# Altium PCB IMU_Pcb.PcbDoc
Units mil, origin at the board's own origin, x right, y up, seen from the top; angles counter-clockwise.
Board outline 550 x 500 mil, 2 copper layers (Top Layer, Bottom Layer); 20 components, 10 nets, 59 pads, 10 vias.
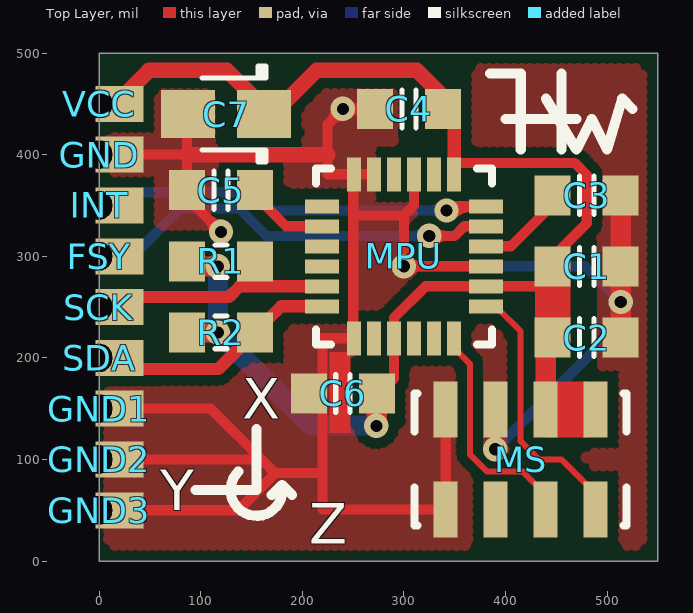
[diagram p0: Top Layer view]
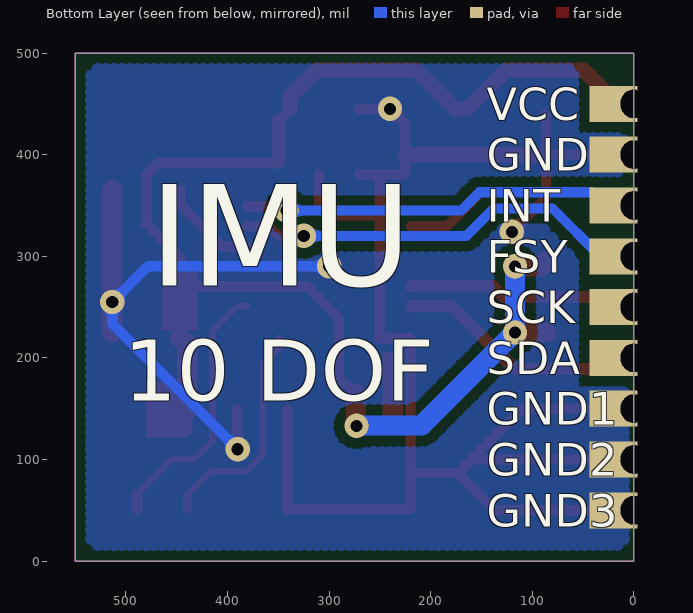
[diagram p1: Bottom Layer view, seen from below]
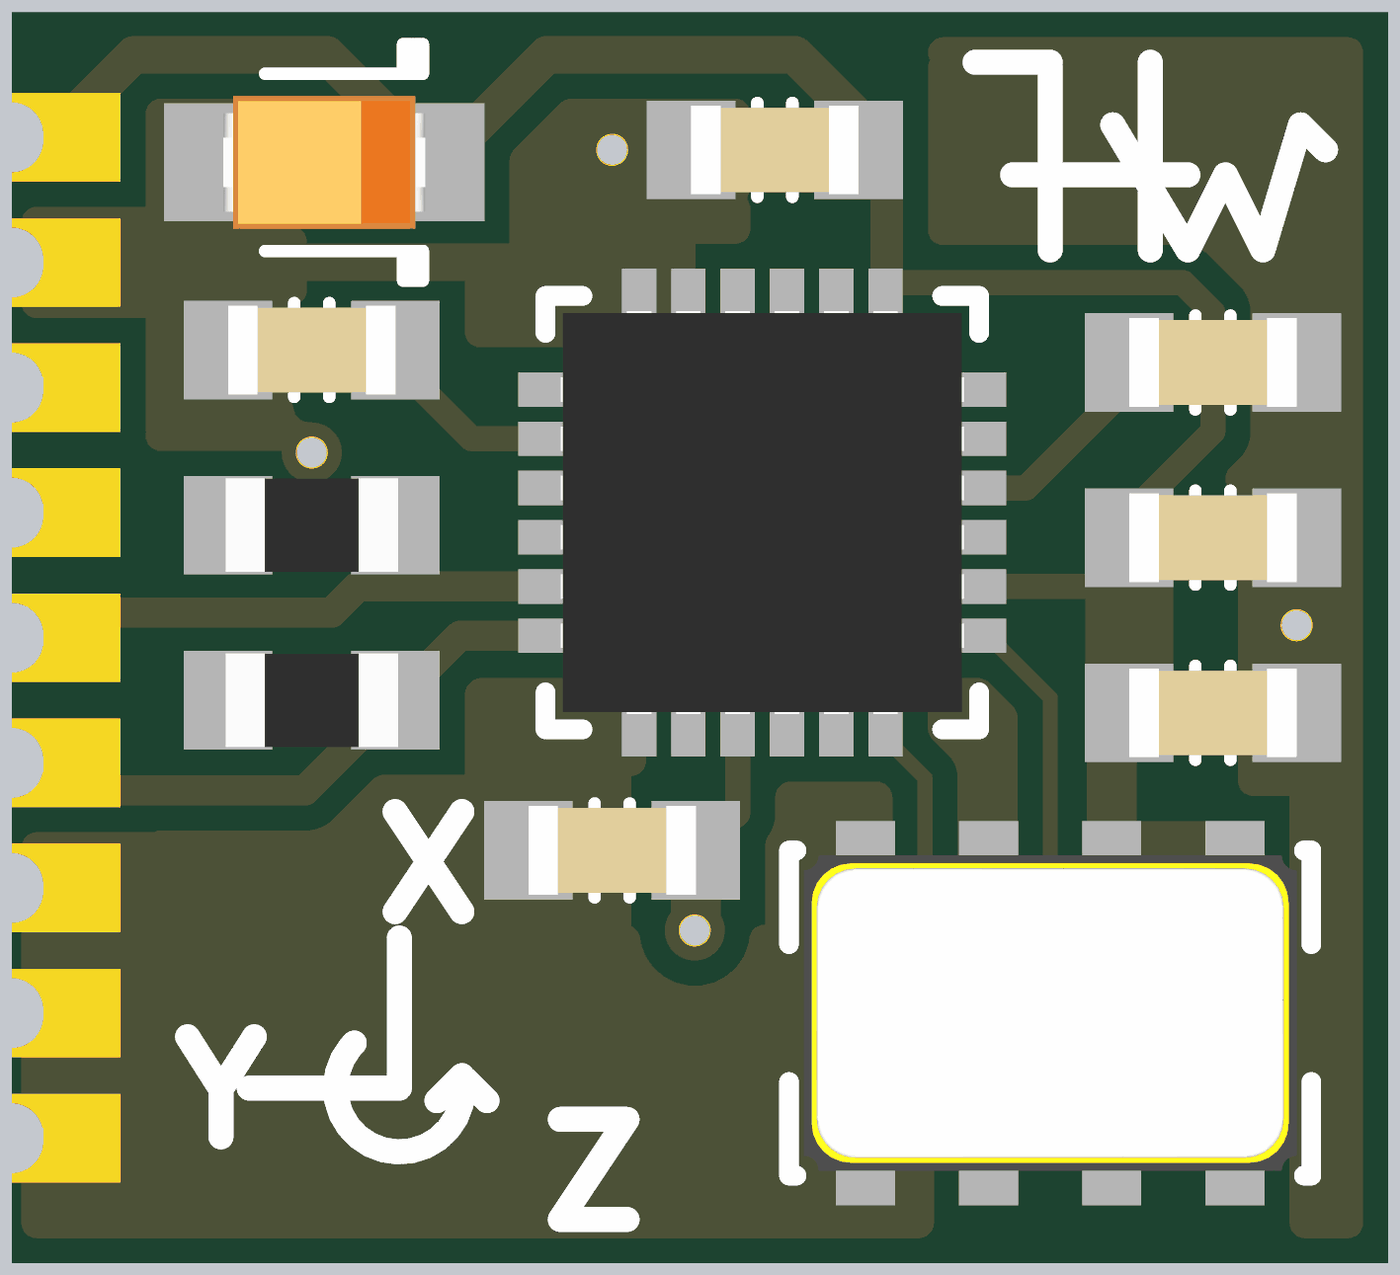
[diagram p2: 3D render of the assembled board from above, using the file's embedded part models]

## Layer stack, top to bottom
Top Layer: signal copper 1.4
Dielectric: dielectric 12.6, FR-4, Dk 4.8
Bottom Layer: signal copper 1.4

## Board outline
0,500 550,500 550,0 0,0

## Design rules (kind name [scope] priority, off if disabled: settings)
Clearance ClearancePolygon [InPolygon] p1: gap=10
Clearance [All] p2: gap=5
ComponentClearance [All] p1: gap=0 collisioncheckmode=3 verticalgap=0 showdistances=FALSE
HoleToHoleClearance [All] p1: gap=6 allowstackedmicrovias=TRUE
MinimumSolderMaskSliver [All] p1: minsoldermaskwidth=5
PlaneConnect [All] p1: planeconnectstyle=Direct reliefexpansion=20 reliefentries=4 reliefconductorwidth=10 reliefairgap=10
PolygonConnect [All] p1: connectstyle=Direct reliefconductorwidth=10 reliefentries=4 polygonreliefangle="90 Angle" airgapwidth=10
RoutingVias [All] p1: holewidth=12 width=20 viastyle="Through Hole" minholewidth=12 minwidth=20 maxholewidth=28 maxwidth=50
SilkToSilkClearance [All] p1: silktosilkclearance=0
SilkToSolderMaskClearance [IsPad] p1: minsilkscreentomaskgap=2 clearancetoexposedcopper=TRUE
SolderMaskExpansion [All] p1: expansion=0
Width [All] p1: maxlimit=20 minlimit=6 preferedwidth=10
22 further rules are at their usual default settings.

## Components (designator, comment, footprint, x,y, rotation, side; value= is the part's Value field where it differs from the comment)
C1 "Cap_0603" CAP_0603 480,290 r180 top
C2 "Cap_0603" CAP_0603 480,220 r180 top
C3 "Cap_0603" CAP_0603 480,360 r180 top
C4 "Cap_0603" CAP_0603 305,445 r0 top
C5 "Cap_0603" CAP_0603 120,365 r180 top
C6 "Cap_0603" CAP_0603 240,165 r180 top
C7 "Cap_Tan_0805" CAP_TAN_P0805 125,440 r180 top
FSY "Pad1X1_1.27" Pad1X1_1.27 0,300 r0 top
GND "Pad1X1_1.27" Pad1X1_1.27 0,400 r0 top
GND1 "Pad1X1_1.27" Pad1X1_1.27 0,150 r0 top
GND2 "Pad1X1_1.27" Pad1X1_1.27 0,100 r0 top
GND3 "Pad1X1_1.27" Pad1X1_1.27 0,50 r0 top
INT "Pad1X1_1.27" Pad1X1_1.27 0,350 r0 top
MPU "MPU9150" MPU9150 300,300 r90 top
MS "MS5611" MS5611 415,100 r270 top
R1 "Res_0603" RES_0603 120,295 r0 top
R2 "Res_0603" RES_0603 120,225 r0 top
SCK "Pad1X1_1.27" Pad1X1_1.27 0,250 r0 top
SDA "Pad1X1_1.27" Pad1X1_1.27 0,200 r0 top
VCC "Pad1X1_1.27" Pad1X1_1.27 0,450 r0 top

## Footprints (in the part's own frame and the unit in brackets; to place one, negate y for a bottom-side part, rotate by r counter-clockwise, add the part's x,y. Pads: shape width x height; smd on the part's side, far side on the other; paste and mask are expansions set on the pad)
CAP_0603 [mm] "Chip Capacitor, Body 1.6x0.8mm, 0603, IPC Medium Density"
  rect 0.9x1 smd: 1(-0.85,0) 2(0.85,0)
  Top Layer pour cut-out: -0.4,0.6 0.4,0.6 0.4,-0.6 -0.4,-0.6
  silkscreen extent -0.18,-0.48 0.18,0.48, body extent -0.85,-0.45 0.85,0.45, height 0.89
CAP_TAN_P0805 [mm] "Molded body capacitor, Body 2.0x1.2mm, 0805, IPC Medium Density"
  rect 1.35x1.2 smd: 1(-0.95,0) 2(0.95,0)
  Top Layer pour cut-out: -0.4,0.8 0.4,0.8 0.4,-0.8 -0.4,-0.8
  silkscreen extent -1,-1.2 0.6,1.2, body extent -1.02,-0.67 1.03,0.68, height 1.5
MPU9150 [mm] "QFN, 24-Leads, Body 4.00x4.00mm, Pitch 0.50mm, IPC Medium Density"
  rect 0.85x0.35 smd: 1(-2.05,1.25) 2(-2.05,0.75) 3(-2.05,0.25) 4(-2.05,-0.25) 5(-2.05,-0.75) 6(-2.05,-1.25) 13(2.05,-1.25) 14(2.05,-0.75) 15(2.05,-0.25) 16(2.05,0.25) 17(2.05,0.75) 18(2.05,1.25)
  rect 0.35x0.85 smd: 7(-1.25,-2.05) 8(-0.75,-2.05) 9(-0.25,-2.05) 10(0.25,-2.05) 11(0.75,-2.05) 12(1.25,-2.05) 19(1.25,2.05) 20(0.75,2.05) 21(0.25,2.05) 22(-0.25,2.05) 23(-0.75,2.05) 24(-1.25,2.05)
  silkscreen extent -2.2,-2.2 2.2,2.2, body extent -2.04,-2.04 2.05,2.05, height 0.8
MS5611 [mm] "QFN, 8-Leads, Body 5.00x3.00mm, Pitch 1.25mm/0.00mm, Thermal Pad 4.35x0.00mm, IPC Medium Density"
  rect 1.4x0.6 smd: 1(-1.25,1.875) 2(-1.25,0.625) 3(-1.25,-0.625) 4(-1.25,-1.875) 5(1.25,-1.875) 6(1.25,-0.625) 7(1.25,0.625) 8(1.25,1.875)
  silkscreen extent -1.65,-2.65 1.65,2.65, body extent -1.6,-2.5 1.6,2.5, height 1
Pad1X1_1.27 [mm] "Connector; Header; 2 Position"
  rect 1.2x0.9 hole 0.65 slot 0.711 at 90 deg copper offset 0.508,0: 1(0,0)
RES_0603 [mm]
  rect 0.9x1 smd: 1(-0.85,0) 2(0.85,0)
  Top Layer pour cut-out: -0.4,0.6 0.4,0.6 0.4,-0.6 -0.4,-0.6
  silkscreen extent -0.15,-0.41 0.15,0.41, body extent -0.87,-0.47 0.88,0.48, height 0.54

## Part data
C1 C2 C3 C4 C5 C6 C7: "Capacitor"
FSY GND GND1 GND2 GND3 INT SCK SDA VCC: "Header"
MPU MS: "Sensor"
R1 R2: "Resistor"

## Via types
v1: diameter 24, hole 12, Top Layer to Bottom Layer, 10 vias

## Nets (pads, with @x,y where several pads share a name; then routed paths per layer and width w, separated by ;. In a path a pad name is that pad's centre, name@x,y a point inside that pad or via, vN(x,y) a via of type N, cw(c..) or ccw(c..) an arc to the next point about the centre after c; other vN are vias at no path point)
3V3: C1.2 C2.2 C4.2 C6.1 C7.1 MPU.3 MPU.8 MPU.13 MS.1 MS.2 R1.1 R2.1 VCC.1 | length 1478.5
  Top Layer w10: VCC.1 VCC.1@16,450 ; v1(273,133) v1@273.46,133.46 ; C6.1 290.16,179.69 MPU.3 290.16,239.16 321.47,270.47 MPU.8 439.61,270.47 C1.2@439.61,283.07 ; C4.2 C4.2@349.65,433.82 ; MPU.13@349.65,391.92 468.08,391.92 480,380 480,332.39 446.54,298.92 C1.2 C2.2 ; MS.2@439.61,129.21 MS.2
  Top Layer w13: MPU.13@349.65,391.92 C4.2@349.65,433.82
  Top Layer w15: VCC.1@16,450 49,483 126,483 164,445 175.94,445 213.94,483 312.91,483 338.46,457.45 C4.2
  Top Layer w20: R2.1 v1(117,225) ; R1.1 91.54,290 v1(117,290) ; v1@273.46,133.46 C6.1 ; MS.2 439.61,213.07 C2.2
  Bottom Layer w20: v1(117,290) v1(117,225) 208.54,133.46 v1@273.46,133.46
CPOUT: C5.1 MPU.20 | length 78.4
  Top Layer w10: C5.1@153.46,360 183.94,329.53 MPU.20
ES_CL: MPU.7 MS.8 | length 263.2
  Top Layer w6: MPU.7 390.21,250.79 415,226 415,118 433,100 455,100 MS.8@488.82,66.18
  Top Layer w10: MS.8 MS.8@488.82,66.18
ES_DA: MPU.6 MS.7 | length 226.4
  Top Layer w6: MPU.6@349.21,209.79 365,194 365,105 382,88 417,88 MS.7@439.61,65.39
  Top Layer w8: MPU.6@349.21,209.79 MPU.6 ; MS.7 MS.7@439.61,65.39
FSY: FSY.1 MPU.11 | length 468.4
  Top Layer w10: v1(325,320) 350,320 359.53,329.53 MPU.11 ; v1@329.95,315.05 cw(c341.9,303.1) 341.9,320 cw(c341.9,336.9) v1@329.95,324.95
  Bottom Layer w10: FSY.1 33,300 80,347 138,347 165,320 v1(325,320) ; v1@320.05,315.05 ccw(c308.1,303.1) 308.1,320 ccw(c308.1,336.9) v1@320.05,324.95
GND: C1.1 C2.1 C3.1 C4.1 C5.2 C6.2 C7.2 GND1.1 GND2.1 GND3.1 GND.1 MPU.1 MPU.9 MPU.15 MPU.17 MPU.18 MS.3 MS.4 MS.5 | length 2822.2
  Top Layer w10: GND3.1 136.93,50 173.46,86.54 ; GND2.1 160,100 ; GND1.1 110,150 160,100 ; GND.1 86.54,400 ; C5.2@86.54,360 86.54,357.46 v1(120,324) ; C5.2 86.54,400 ; C7.2 86.54,438.94 86.54,400 ; v1@113,324 ccw(c96.1,324) 108.05,335.95 ccw(c120,347.9) v1@120,331 ; v1@233,445 cw(c216.1,445) 228.05,433.05 cw(c240,421.1) v1@240,438 ; v1@244.95,440.05 cw(c256.9,428.1) 256.9,445 cw(c256.9,461.9) v1@244.95,449.95 ; MPU.1@250.16,219.29 250.16,340.16 ; MPU.1 220,219.29 220,86.54 ; MPU.17 MPU.18 ; C4.1 v1(240,445) 225,430 225,400 225,380.71 MPU.18 ; v1@295.05,295.11 ccw(c283.1,307.06) 300,307.06 ccw(c316.9,307.06) 304.95,295.11 ccw(c316.9,307.06) 316.9,290.16 ccw(c316.9,273.26) v1@304.95,285.21 ; MPU.15 309.84,350 300,340.16 ; MS.4 MS.5 220,50.79 220,86.54 ; MPU.9 v1(300,290.16) 300,340.16 ; v1@385.05,114.95 ccw(c372.15,127.85) MS.3@390.39,127.85 ; v1@390.39,110.39 MS.3 ; MS.3@390.39,125.95 ccw(c405.95,125.95) v1@394.95,114.95 ; v1@508.51,250.05 cw(c496.57,238.1) 513.46,238.1 cw(c530.36,238.1) v1@518.41,250.05 ; v1@508.51,259.95 ccw(c496.57,271.9) 513.46,271.9 ccw(c530.36,271.9) v1@518.41,259.95 ; C3.1@513.46,365 C3.1@515,366.54 ; 160,100 173.46,86.54 ; 173.46,86.54 220,86.54 ; 250.16,340.16 300,340.16 ; 250.16,340.16 250.16,380.08 MPU.18
  Top Layer w15: 86.54,400 225,400
  Top Layer w20: C2.1@513.46,225 C3.1@513.46,365
  Bottom Layer w10: v1(300,290.16) 478.31,290.16 v1(513.46,255) 513.46,233.46 v1(390,110) ; v1@304.95,285.21 cw(c316.9,273.26) 316.9,290.16 cw(c316.9,307.06) v1@304.95,295.11 ; v1@390,117 ccw(c390,133.9) 401.95,121.95 ccw(c413.9,110) v1@397,110 ; v1@506.46,255 ccw(c489.57,255) 501.51,266.95 ccw(c513.46,278.9) v1@513.46,262 ; v1@508.51,250.05 cw(c496.57,238.1) 513.46,238.1 cw(c530.36,238.1) v1@518.41,250.05
INT: INT.1 MPU.12 | length 439.4
  Top Layer w10: v1(342,345) 346.21,349.21 MPU.12 ; v1@346.95,340.05 cw(c369.07,317.93) MPU.12@369.07,349.21
  Bottom Layer w10: INT.1 29,350 42,363 152,363 170,345 v1@335,345 ; v1@337.05,340.05 ccw(c325.1,328.1) 325.1,345 ccw(c325.1,361.9) v1@337.05,349.95
REGO: C3.2 MPU.10 | length 96.9
  Top Layer w10: MPU.10 405.38,309.84 446.54,350.99 C3.2@446.54,365
SCK: MPU.23 R1.2 SCK.1 | length 227.8
  Top Layer w8: SCK.1 30,250 SCK.1@40,260
  Top Layer w12: SCK.1@40,260 128,260 138.47,270.47 MPU.23
SDA: MPU.24 R2.2 SDA.1 | length 249.4
  Top Layer w8: SDA.1 30,200 SDA.1@41,189
  Top Layer w12: SDA.1@41,189 117.46,189 R2.2 179.25,250.79 MPU.24
pads on no net: MPU.2 MPU.4 MPU.5 MPU.14 MPU.16 MPU.19 MPU.21 MPU.22 MS.6

## Polygon pours and split planes (outlines as drawn)
GND on Top Layer "Top Layer-No Net" (hatched 90Degree grid 8 track 12, remove dead copper, pour order 4): 10,500 550,500 550,0 10,0
GND on Bottom Layer "Top Layer-No Net" (hatched 90Degree grid 8 track 12, remove dead copper, pour order 6): 10,500 550,500 550,0 10,0

## Keep-outs
Keep-Out Layer:
  lines w0: 0,0 550,0 550,500 0,500

## Other copper
Top Layer:
  rectangle net GND: 227,126 247.58,206
  rectangle net 3V3: 439.75,121.61 480.03,176.72
  rectangle net 3V3: 429,227 464.25,290
  pour cut-out: 132,419 131,418 113.25,418 109.25,414 112,411.25 112,379 115,376 116,377 129,377
  pour cut-out: 319,403 294,403 289.25,407.75 289.25,430 300,435 304,436 310,437
  pour cut-out: 334,490 366,490 372,492 372.18,478 367,474 362,469 358,473 340,473
  pour cut-out: 146,320 142,324 112.69,324 114,330 108.05,335.95 104.25,350 121,350 124,353
  pour cut-out: 464,279 494.75,279 496,277.75 496,184 464,184
  pour cut-out: 360,311 360,289 301.16,289 296,294.16 296,312.32

## Silkscreen, mask and mechanical layers (free items; w line width, h text height)
Top Overlay:
  lines w10: 95,70 155,70 155,130 ; 136.97,88.03 ccw(c155,70) 180,75 ; 170,65 180,75 ; 190,65 180,75 ; 385,480 415,480 415,405 ; 400,435 470,435 ; 440,455 470,405 485,435 500,405 515,455 525,445 ; 455,405 455,480
  text "X" at 141,140 h40
  text "Y" at 60,50 h40
  text "Z" at 207,17 h40
Bottom Overlay:
  text "IMU" at 477,271 h100
  text "10 DOF" at 502,158 h60
Mechanical 1:
  the board outline again, w0

## Dimensions
0,500 to 0,0 on Mechanical 14
0,500 to 550,500 on Mechanical 14